# Allegro board PHYSIOTHERAPY_V31_sli.brd
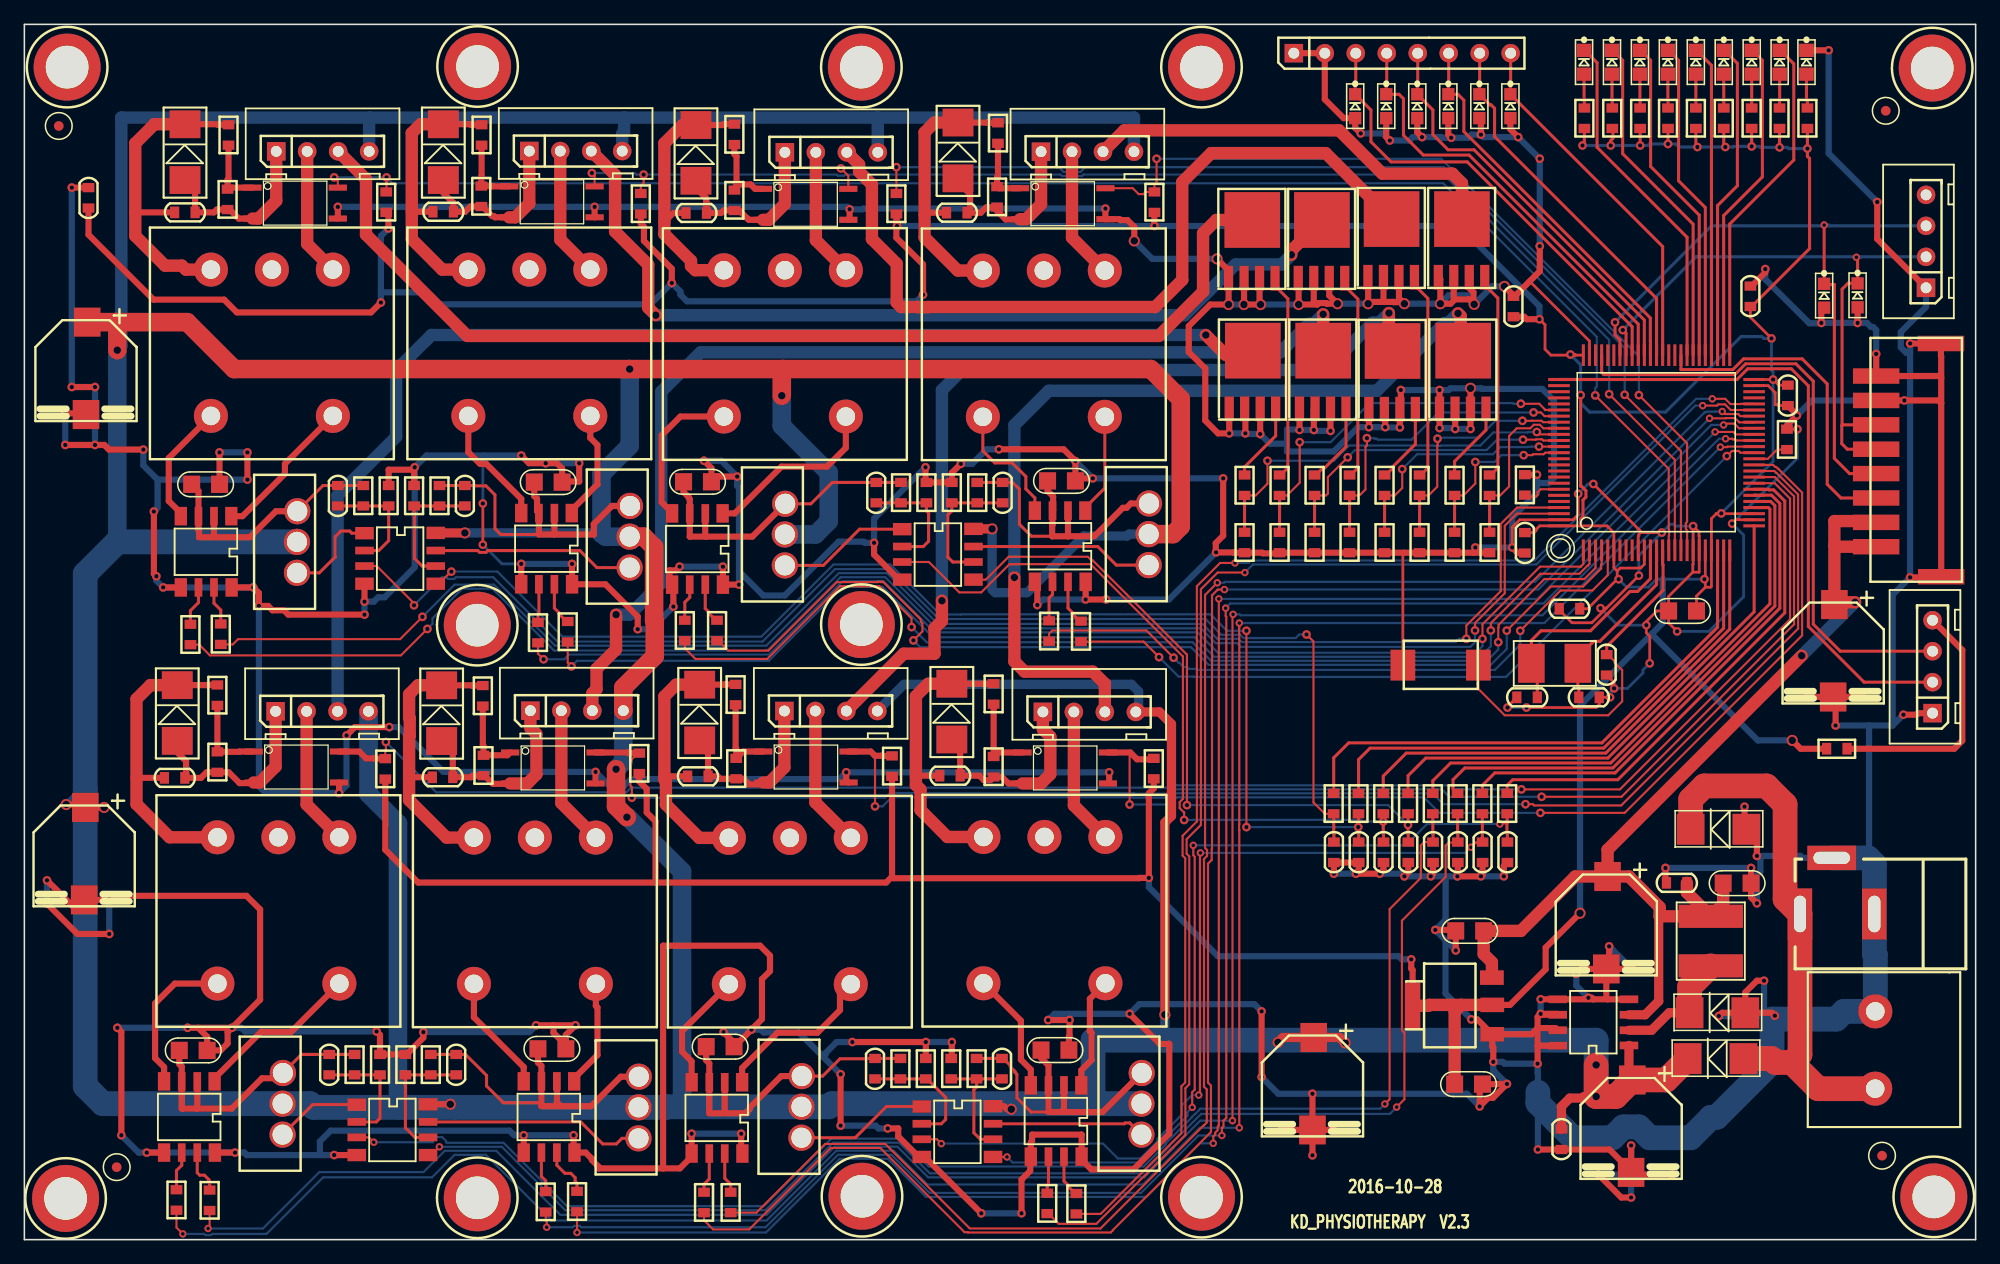
[diagram p0: board, top side]
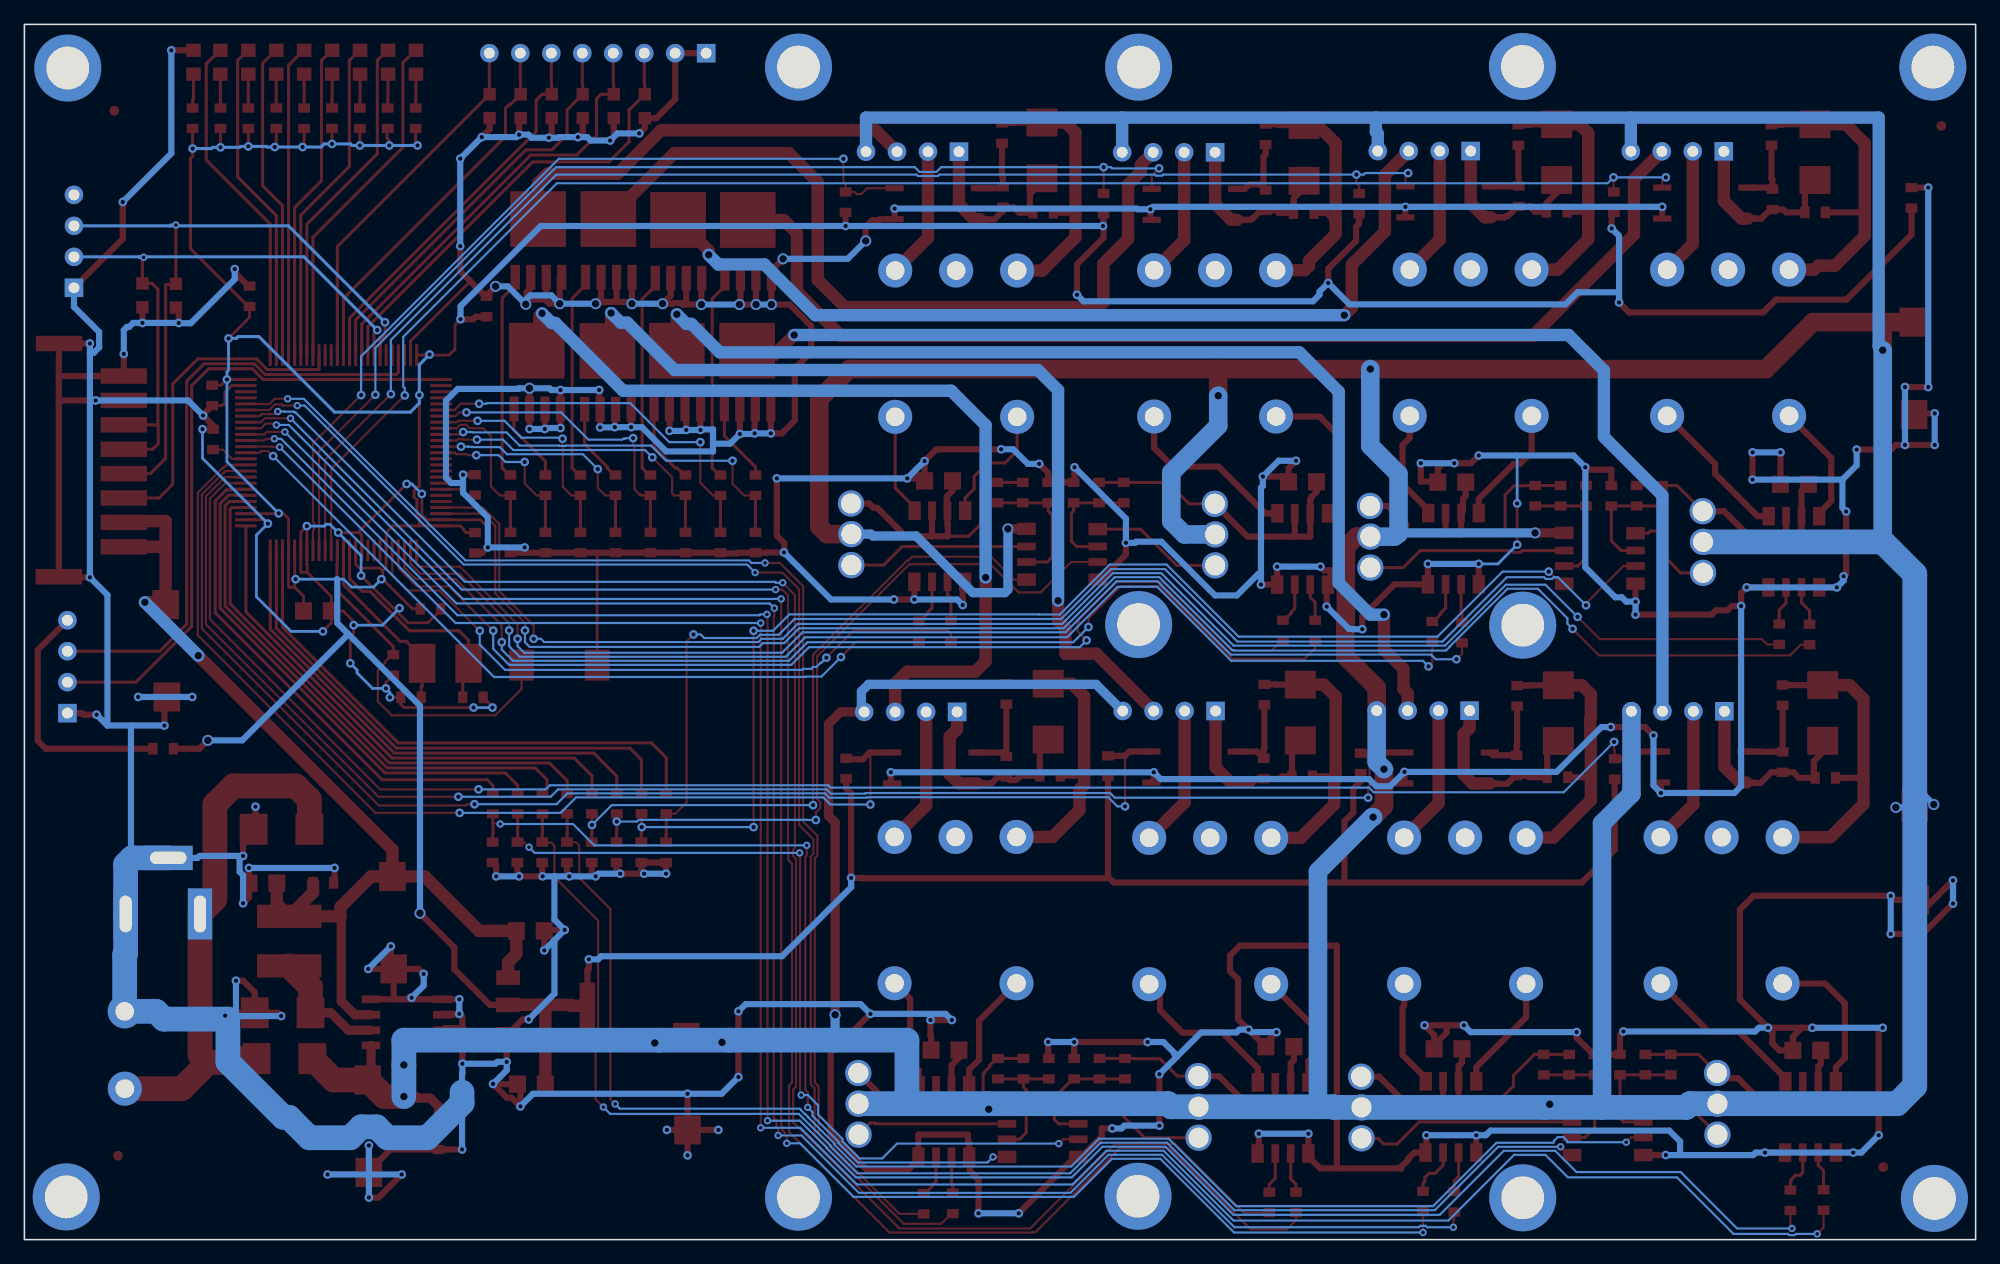
[diagram p1: board, bottom side, seen from below]

Outline 159.99 x 99.67 mm; copper layers: TOP, BOTTOM. Coordinates in mm from the lower left corner of the outline.
Outline path: 0,99.67 0,0 159.99,0 159.99,99.67 0,99.67

## Placement (name value [footprint] x y rotation side)
C1  220uf/35V  [CAP_SMD_8X10D5]  136.8 11.27 270 top
C2  0.1uF  [C0603]  126.03 8.23 90 top
C3  220uf/35V  [CAP_SMD_8X10D5]  134.77 27.96 270 top
C4  0.1uF  [C0603]  135.48 29.26 0 top
C5  10uF  [C0805]  140.44 29.24 180 top
C6  10uF  [C0805]  118.51 25.32 0 top
C7  10uF  [C0805]  118.42 12.75 180 top
C8  0.1uF  [C0603]  5.26 85.45 270 top
C9  15pF  [C0603]  123.22 44.48 0 top
C10  15pF  [C0603]  128.3 44.48 180 top
C11  0.1uF  [C0603]  129.74 47.14 90 top
C64  220uf/35V  [CAP_SMD_8X10D5]  153.37 50.27 270 top
C65  220uf/35V  [CAP_SMD_8X10D5]  10.1 73.43 270 top
C66  220uf/35V  [CAP_SMD_8X10D5]  110.67 14.76 270 top
C67  220uf/35V  [CAP_SMD_8X10D5]  9.95 33.63 270 top
C106  0.1uF  [C0603]  123.04 57.15 270 top
C107  0.1uF  [C0603]  122.1 76.53 90 top
C108  0.1uF  [C0603]  141.53 77.37 90 top
C109  0.1uF  [C0603]  144.6 69.24 270 top
C110  0.1uF  [C0603]  126.7 51.74 180 top
C121  15pF  [C0603]  25.7 61.01 270 top
C122  27nF  [C0603]  107.38 31.77 90 top
C123  15pF  [C0603]  36.12 61.01 270 top
C124  15pF  [C0603]  69.85 61.26 270 top
C125  15pF  [C0603]  80.21 61.26 270 top
C126  15pF  [C0603]  24.99 14.35 270 top
C127  15pF  [C0603]  35.41 14.35 270 top
C128  15pF  [C0603]  69.75 14.02 270 top
C129  15pF  [C0603]  80.16 14.02 270 top
C130  27nF  [C0603]  109.41 31.77 90 top
C131  27nF  [C0603]  111.44 31.77 90 top
C132  27nF  [C0603]  113.47 31.77 90 top
C133  27nF  [C0603]  115.51 31.77 90 top
C134  27nF  [C0603]  117.54 31.77 90 top
C135  27nF  [C0603]  119.57 31.77 90 top
C136  27nF  [C0603]  121.6 31.77 90 top
C137  10uF  [C0805]  135.97 51.56 0 top
C142  10uF  [C0805]  14.86 61.95 180 top
C143  10uF  [C0805]  42.95 62.13 180 top
C144  10uF  [C0805]  55.19 62.15 180 top
C145  10uF  [C0805]  85.04 62.23 180 top
C146  10uF  [C0805]  13.84 15.52 180 top
C147  10uF  [C0805]  43.26 15.65 180 top
C148  10uF  [C0805]  57.05 15.82 180 top
C149  10uF  [C0805]  84.51 15.54 180 top
C150  0.1uF  [C0603]  13.16 84.25 0 top
C151  0.1uF  [C0603]  34.34 84.3 0 top
C152  0.1uF  [C0603]  55.09 84.2 0 top
C153  0.1uF  [C0603]  76.45 84.23 0 top
C154  0.1uF  [C0603]  75.9 38.05 0 top
C155  0.1uF  [C0603]  55.22 38 0 top
C156  0.1uF  [C0603]  34.29 37.92 0 top
C157  0.1uF  [C0603]  12.32 37.87 0 top
D1  SS34  [SMA]  138.67 14.85 0 top
D2  SS34  [SMA]  138.82 18.61 0 top
D3  ESD5Z3V3  [SOD-523]  121.85 92.96 270 top
D5  LED  [LED0603]  146.13 96.58 270 top
D6  ESD5Z3V3  [SOD-523]  119.3 92.96 270 top
D7  LED  [LED0603]  127.89 96.58 270 top
D9  LED  [LED0603]  130.18 96.58 270 top
D10  ESD5Z3V3  [SOD-523]  116.76 92.96 270 top
D12  LED  [LED0603]  132.47 96.58 270 top
D13  LED  [LED0603]  134.76 96.58 270 top
D14  ESD5Z3V3  [SOD-523]  114.21 92.96 270 top
D16  LED  [LED0603]  137.05 96.58 270 top
D17  ESD5Z3V3  [SOD-523]  111.67 92.96 270 top
D19  LED  [LED0603]  139.34 96.58 270 top
D20  ESD5Z3V3  [SOD-523]  109.12 92.96 270 top
D21  LED  [LED0603]  141.64 96.58 270 top
D23  LED  [LED0603]  143.93 96.58 270 top
D25  SMBJ12A  [SMA]  138.91 33.66 0 top
D32  M7  [DO-214AC]  13.17 89.19 270 top
D33  M7  [DO-214AC]  12.53 43.19 270 top
D34  M7  [DO-214AC]  34.21 43.18 270 top
D35  M7  [DO-214AC]  34.35 89.19 270 top
D36  M7  [DO-214AC]  55.07 89.13 270 top
D37  M7  [DO-214AC]  55.37 43.23 270 top
D38  M7  [DO-214AC]  76.05 43.31 270 top
D39  M7  [DO-214AC]  76.56 89.33 270 top
D40  ESD5Z3V3  [SOD-523]  147.57 77.42 270 top
D41  ESD5Z3V3  [SOD-523]  150.32 77.44 270 top
H1  NC/mechanical _pad  [HOLE_3D5_6D0_MM]  3.38 3.38 0 top
H2  NC/mechanical _pad  [HOLE_3D5_6D0_MM]  3.51 96.16 0 top
H3  NC/mechanical _pad  [HOLE_3D5_6D0_MM]  156.57 3.51 0 top
H4  NC/mechanical _pad  [HOLE_3D5_6D0_MM]  156.44 96.09 0 top
H5  NC/mechanical _pad  [HOLE_3D5_6D0_MM]  68.63 96.16 0 top
H6  NC/mechanical _pad  [HOLE_3D5_6D0_MM]  68.68 3.56 0 top
H7  NC/mechanical _pad  [HOLE_3D5_6D0_MM]  96.52 96.16 0 top
H8  NC/mechanical _pad  [HOLE_3D5_6D0_MM]  37.13 3.43 0 top
H9  NC/mechanical _pad  [HOLE_3D5_6D0_MM]  96.52 3.48 0 top
H10  NC/mechanical _pad  [HOLE_3D5_6D0_MM]  68.63 50.44 0 top
H11  NC/mechanical _pad  [HOLE_3D5_6D0_MM]  37.13 50.39 0 top
H12  NC/mechanical _pad  [HOLE_3D5_6D0_MM]  37.16 96.22 0 top
ISO14  TLP185  [TLP121]  22.2 85.01 0 top
ISO15  TLP185  [TLP121]  43.26 85.12 0 top
ISO16  TLP185  [TLP121]  64.06 84.91 0 top
ISO17  TLP185  [TLP121]  85.14 84.96 0 top
ISO18  TLP185  [TLP121]  22.3 38.76 0 top
ISO19  TLP185  [TLP121]  43.33 38.68 0 top
ISO20  TLP185  [TLP121]  64.08 38.76 0 top
ISO21  TLP185  [TLP121]  85.34 38.68 0 top
JP_1  kf635-2p  [KF635-2P]  152.63 15.3 90 top
JP_2  dc-005  [DC-005]  159.19 26.71 180 top
JP_KEY1  dpz_2d54_8p  [DPZ_2D54_8P]  104.09 97.31 0 top
JP_SWD  -  [XH-4A]  156.46 43.18 90 top
JP_USART  -  [XH-4A]  155.93 78.07 90 top
JS_LCD  dwin_2d0_8p  [DWIN_2D0_8P]  151.86 63.86 270 top
KS_REST  KEY_3x6x2d5_2p_SMD  [KEY_3X6X2D5_2P_SMD]  116.18 46.94 180 top
L1  47UH  [CD54]  138.28 24.49 0 top
M1  NC/mark  [MARK]  7.57 5.94 0 top
M2  NC/mark  [MARK]  152.63 92.58 0 top
M3  NC/mark  [MARK]  152.32 6.88 0 top
M4  NC/mark  [MARK]  2.82 91.34 0 top
Q2  PSMN7R0-30YL  [SOT669]  101.04 79.11 0 top
Q3  PSMN7R0-30YL  [SOT669]  101.09 68.39 0 top
Q4  PSMN7R0-30YL  [SOT669]  106.76 79.11 0 top
Q5  PSMN7R0-30YL  [SOT669]  106.86 68.39 0 top
Q6  PSMN7R0-30YL  [SOT669]  112.47 79.18 0 top
Q7  PSMN7R0-30YL  [SOT669]  112.55 68.36 0 top
Q8  PSMN7R0-30YL  [SOT669]  118.24 79.18 0 top
Q9  PSMN7R0-30YL  [SOT669]  118.34 68.39 0 top
Q11  TIP31C  [TO220]  22.35 57.23 90 top
Q12  TIP31C  [TO220]  49.63 57.66 90 top
Q13  TIP31C  [TO220]  62.36 57.84 90 top
Q14  TIP31C  [TO220]  92.19 57.86 90 top
Q15  TIP31C  [TO220]  21.17 11.15 90 top
Q16  TIP31C  [TO220]  50.36 10.85 90 top
Q17  TIP31C  [TO220]  63.72 10.9 90 top
Q18  TIP31C  [TO220]  91.59 11.15 90 top
R3  NC/0R  [R0603]  148.62 40.26 180 top
R4  10K  [R0603]  123.04 61.9 270 top
R5  10K  [R0603]  144.53 65.63 270 top
R10  3.3K  [R0603]  100.05 61.87 270 top
R11  3.3K  [R0603]  102.92 61.87 270 top
R12  100K  [R0603]  100.05 57.18 90 top
R13  100K  [R0603]  102.92 57.18 90 top
R14  3.3K  [R0603]  108.66 61.87 270 top
R15  3.3K  [R0603]  105.79 61.87 270 top
R16  100K  [R0603]  108.66 57.18 90 top
R17  100K  [R0603]  105.79 57.18 90 top
R18  3.3K  [R0603]  114.4 61.87 270 top
R19  3.3K  [R0603]  111.53 61.87 270 top
R20  100K  [R0603]  114.4 57.18 90 top
R21  100K  [R0603]  111.53 57.18 90 top
R22  3.3K  [R0603]  120.14 61.87 270 top
R23  3.3K  [R0603]  117.27 61.87 270 top
R24  100K  [R0603]  120.14 57.18 90 top
R25  100K  [R0603]  117.27 57.18 90 top
R26  3.3K  [R0603]  146.2 91.97 90 top
R27  3.3K  [R0603]  127.91 91.97 90 top
R28  3.3K  [R0603]  130.2 91.97 90 top
R29  3.3K  [R0603]  132.49 91.97 90 top
R30  3.3K  [R0603]  134.77 91.97 90 top
R31  3.3K  [R0603]  137.06 91.97 90 top
R32  3.3K  [R0603]  139.34 91.97 90 top
R33  3.3K  [R0603]  141.63 91.97 90 top
R34  3.3K  [R0603]  143.92 91.97 90 top
R36  10K  [R0603]  16.66 85.32 90 top
R37  51R  [R0603]  16.74 90.6 90 top
R38  10K  [R0603]  29.67 85.09 270 top
R39  10K  [R0603]  37.47 85.57 90 top
R40  51R  [R0603]  37.49 90.6 90 top
R41  10K  [R0603]  50.55 84.96 270 top
R42  10K  [R0603]  58.22 85.24 90 top
R43  51R  [R0603]  58.22 90.65 90 top
R44  10K  [R0603]  71.5 84.96 270 top
R45  10K  [R0603]  79.76 85.52 90 top
R46  51R  [R0603]  79.83 90.75 90 top
R47  10K  [R0603]  92.66 85.09 270 top
R48  10K  [R0603]  15.82 39.17 90 top
R49  51R  [R0603]  15.82 44.65 90 top
R50  10K  [R0603]  29.59 38.61 270 top
R51  10K  [R0603]  37.64 38.89 90 top
R52  51R  [R0603]  37.59 44.6 90 top
R53  10K  [R0603]  50.42 39.07 270 top
R54  10K  [R0603]  58.37 38.63 90 top
R55  51R  [R0603]  58.32 44.7 90 top
R56  10K  [R0603]  71.15 38.84 270 top
R57  10K  [R0603]  79.48 38.79 90 top
R58  51R  [R0603]  79.48 44.75 90 top
R59  10K  [R0603]  92.61 38.63 270 top
R66  10K  [R0603]  29.87 61.01 270 top
R67  27K  [R0603]  27.79 61.01 270 top
R68  5.1K  [R0603]  107.36 35.76 90 top
R69  10K  [R0603]  31.95 61.01 270 top
R70  27K  [R0603]  34.04 61.01 270 top
R71  10K  [R0603]  73.96 61.26 270 top
R72  27K  [R0603]  71.88 61.26 270 top
R73  10K  [R0603]  76.05 61.26 270 top
R74  27K  [R0603]  78.13 61.26 270 top
R75  10K  [R0603]  29.16 14.35 270 top
R76  27K  [R0603]  27.08 14.35 270 top
R77  10K  [R0603]  31.24 14.35 270 top
R78  27K  [R0603]  33.32 14.35 270 top
R79  10K  [R0603]  73.91 14.02 270 top
R80  27K  [R0603]  71.83 14.02 270 top
R81  10K  [R0603]  76 14.02 270 top
R82  27K  [R0603]  78.08 14.02 270 top
R83  5.1K  [R0603]  109.39 35.76 90 top
R84  5.1K  [R0603]  111.42 35.76 90 top
R85  5.1K  [R0603]  113.46 35.76 90 top
R86  5.1K  [R0603]  115.49 35.76 90 top
R87  5.1K  [R0603]  117.52 35.76 90 top
R88  5.1K  [R0603]  119.55 35.76 90 top
R89  5.1K  [R0603]  121.58 35.76 90 top
R90  10K  [R0603]  13.61 49.63 270 top
R91  10K  [R0603]  16.1 49.66 270 top
R92  10K  [R0603]  42.11 49.78 270 top
R93  10K  [R0603]  44.55 49.86 270 top
R94  10K  [R0603]  54.15 49.96 270 top
R95  10K  [R0603]  56.79 49.96 270 top
R96  10K  [R0603]  84.02 49.91 270 top
R97  10K  [R0603]  86.64 49.89 270 top
R98  10K  [R0603]  12.47 3.25 270 top
R99  10K  [R0603]  15.19 3.23 270 top
R100  10K  [R0603]  42.75 3.1 270 top
R101  10K  [R0603]  45.31 3.12 270 top
R102  10K  [R0603]  55.73 3.05 270 top
R103  10K  [R0603]  57.91 3.05 270 top
R104  10K  [R0603]  83.87 2.97 270 top
R105  10K  [R0603]  86.26 2.95 270 top
SIN_1  -  [XH-4A]  20.65 89.26 0 top
SIN_2  -  [XH-4A]  41.4 89.28 0 top
SIN_3  -  [XH-4A]  62.36 89.18 0 top
SIN_4  -  [XH-4A]  83.36 89.23 0 top
SIN_5  -  [XH-4A]  20.6 43.33 0 top
SIN_6  -  [XH-4A]  41.49 43.38 0 top
SIN_7  -  [XH-4A]  62.32 43.36 0 top
SIN_8  -  [XH-4A]  83.52 43.28 0 top
TX1  -  [E19]  20.29 73.56 90 top
TX2  -  [E19]  41.4 73.56 90 top
TX3  -  [E19]  62.36 73.51 90 top
TX4  -  [E19]  83.59 73.48 90 top
TX5  -  [E19]  20.83 27 90 top
TX6  -  [E19]  41.86 26.97 90 top
TX7  -  [E19]  62.76 26.95 90 top
TX8  -  [E19]  83.64 27.03 90 top
U1  XL1509-5.0  [SOIC8]  128.65 17.81 90 top
U2  LM1117-3.3  [SOT-223]  120.31 19.18 90 top
U12  STM32F103VET6  [LQFP100]  133.83 64.54 90 top
U35  MC33202DR2G  [SOP8]  28.14 57.78 270 top
U36  MC33202DR2G  [SOP8]  72.24 58.12 270 top
U37  MC33202DR2G  [SOP8]  27.51 10.92 270 top
U38  MC33202DR2G  [SOP8]  73.84 10.77 270 top
U42  L9110S  [SOP8]  16.81 59.08 180 top
U43  L9110S  [SOP8]  44.73 59.33 180 top
U44  L9110S  [SOP8]  57.1 59.31 180 top
U45  L9110S  [SOP8]  86.84 59.54 180 top
U46  L9110S  [SOP8]  15.44 12.73 180 top
U47  L9110S  [SOP8]  44.93 12.73 180 top
U48  L9110S  [SOP8]  58.7 12.65 180 top
U49  L9110S  [SOP8]  86.51 12.4 180 top
Y1  8M  [CY5032_2P]  125.48 47.27 180 top

## Library data of the parts
C1-C11 C64-C67 C106-C110 C121-C137 C142-C157 = C
D1-D3 D6 D10 D14 D17 D20 D25 D32-D41 = DIODE
D5 D7 D9 D12 D13 D16 D19 D21 D23 = LED0603
H1-H12 M1-M4 = PAD
ISO14-ISO21 = H11G2_1
JP_1 = header_3d5_6
JP_2 = header_3d5_0
JP_KEY1 = CON8
JP_SWD JP_USART SIN_1-SIN_8 = HEADER 4
JS_LCD = dwin_2d0_8p
KS_REST = SW PUSHBUTTON_0
L1 = INDUCTOR_0
Q2-Q9 = STP55NF06L_1
Q11-Q18 = TIP31C_1
R3-R5 R10-R34 R36-R59 R66-R105 = R
TX1-TX8 = E19
U1 = XL1509
U2 = 1117
U12 = STM32F103VE_1
U35-U38 = OMAP_2
U42-U49 = MC34151
Y1 = CRYSTAL

## Footprints (pads in the part's own frame, mm; a bottom-side part is the same pattern mirrored in y, then rotated)
C0603
  rect 0.762x0.965 smd: 1(-0.838,0) 2(0.838,0)
C0805
  rect 1.397x1.422 smd: 1(-1.143,0) 2(1.143,0)
CAP_SMD_8X10D5
  rect 2.388x2.184 smd: 1(-1.82,-4.95) 2(5.76,-5.05)
CD54
  rect 5.283x1.905 smd: 1(0,2.032) 2(0,-2.032)
CY5032_2P
  rect 2.184x3.2 smd: 1(-1.905,0) 2(1.905,0)
DC-005
  rect 2x4.2 hole 1x3: 1(13.6,0) 2(7.5,0)
  rect 4x2 hole 3x1: 3(11,-4.6)
DO-214AC
  rect 2.286x2.54 smd: 1(2.286,0) 2(-2.286,0)
DPZ_2D54_8P
  rect 1.524x1.524 hole 0.889: 1(0,0)
  round 1.524 hole 0.889: 2(2.54,0) 3(5.08,0) 4(7.62,0) 5(10.16,0) 6(12.7,0) 7(15.24,0) 8(17.78,0)
DWIN_2D0_8P
  rect 1.27x3.81 smd: 1(-6.97,-0.02) 2(-4.97,-0.02) 3(-2.97,-0.02) 4(-0.97,-0.02) 5(1.03,-0.02) 6(3.03,-0.02) 7(5.03,-0.02) 8(7.03,-0.02) 9(9.49,5.31) 10(-9.64,5.29)
E19
  round 2.794 hole 1.524: 1(-6,5) 2(-6,-5) 3(6,5) 4(6,-5) 5(6,0)
HOLE_3D5_6D0_MM
  round 5.5 hole 3.5: 1(0,0)
KEY_3X6X2D5_2P_SMD
  rect 2.032x2.54 smd: 1(-3.048,-0.178) 2(3.15,-0.178)
KF635-2P
  round 2.794 hole 1.524: 1(-2.92,0.87) 2(3.42,0.86)
LED0603
  rect 1.092x1.194 smd: 1(0.991,0) 2(-0.965,0)
LQFP100
  rect 1.778x0.254 smd: 1(-8.001,6.002) 2(-8.001,5.502) 3(-8.001,5.001) 4(-8.001,4.501) 5(-8.001,4) 6(-8.001,3.5) 7(-8.001,3) 8(-8.001,2.502) 9(-8.001,2.002) 10(-8.001,1.501) 11(-8.001,1.001) 12(-8.001,0.5) 13(-8.001,0) 14(-8.001,-0.5) 15(-8.001,-1.001) 16(-8.001,-1.501) 17(-8.001,-2.002) 18(-8.001,-2.502) 19(-8.001,-3) 20(-8.001,-3.5) 21(-8.001,-4) 22(-8.001,-4.501) 23(-8.001,-5.001) 24(-8.001,-5.502) 25(-8.001,-6.002) 51(8.001,-6.002) 52(8.001,-5.502) 53(8.001,-5.001) 54(8.001,-4.501) 55(8.001,-4) 56(8.001,-3.5) 57(8.001,-3) 58(8.001,-2.502) 59(8.001,-2.002) 60(8.001,-1.501) 61(8.001,-1.001) 62(8.001,-0.5) 63(8.001,0) 64(8.001,0.5) 65(8.001,1.001) 66(8.001,1.501) 67(8.001,2.002) 68(8.001,2.502) 69(8.001,3) 70(8.001,3.5) 71(8.001,4) 72(8.001,4.501) 73(8.001,5.001) 74(8.001,5.502) 75(8.001,6.002)
  rect 0.254x1.778 smd: 26(-6.002,-8.001) 27(-5.502,-8.001) 28(-5.001,-8.001) 29(-4.501,-8.001) 30(-4,-8.001) 31(-3.5,-8.001) 32(-3,-8.001) 33(-2.502,-8.001) 34(-2.002,-8.001) 35(-1.501,-8.001) 36(-1.001,-8.001) 37(-0.5,-8.001) 38(0,-8.001) 39(0.5,-8.001) 40(1.001,-8.001) 41(1.501,-8.001) 42(2.002,-8.001) 43(2.502,-8.001) 44(3,-8.001) 45(3.5,-8.001) 46(4,-8.001) 47(4.501,-8.001) 48(5.001,-8.001) 49(5.502,-8.001) 50(6.002,-8.001) 76(6.002,8.001) 77(5.502,8.001) 78(5.001,8.001) 79(4.501,8.001) 80(4,8.001) 81(3.5,8.001) 82(3,8.001) 83(2.502,8.001) 84(2.002,8.001) 85(1.501,8.001) 86(1.001,8.001) 87(0.5,8.001) 88(0,8.001) 89(-0.5,8.001) 90(-1.001,8.001) 91(-1.501,8.001) 92(-2.002,8.001) 93(-2.502,8.001) 94(-3,8.001) 95(-3.5,8.001) 96(-4,8.001) 97(-4.501,8.001) 98(-5.001,8.001) 99(-5.502,8.001) 100(-6.002,8.001)
MARK
  round 0.8 smd: 1(0,0)
R0603
  rect 0.762x0.965 smd: 1(-0.838,0) 2(0.838,0)
SMA
  rect 2.286x2.54 smd: 1(2.286,0) 2(-2.286,0)
SOD-523
  rect 1.016x1.016 smd: 1(0.978,0) 2(-0.978,0)
SOIC8
  rect 0.635x1.524 smd: 1(-1.88,-2.921) 2(-0.635,-2.921) 3(0.635,-2.921) 4(1.905,-2.921) 5(1.905,2.921) 6(0.635,2.921) 7(-0.635,2.921) 8(-1.905,2.921)
SOP8
  rect 1.016x1.524 smd: 1(-0.152,-0.254) 4(3.988,-0.254) 5(3.988,5.588) 8(-0.178,5.588)
  rect 0.635x1.524 smd: 2(1.27,-0.254) 3(2.54,-0.254) 6(2.54,5.588) 7(1.27,5.588)
SOT669
  rect 0.762x2.032 smd: 1(-2.3,-0.254) 2(-1.03,-0.254) 3(0.24,-0.254) 4(1.51,-0.254)
  rect 4.572x4.572 smd: 5(-0.36,4.52)
SOT-223
  rect 1.194x1.956 smd: 1(-2.337,-0.051) 2(0.076,-0.051) 3(2.311,-0.025)
  rect 3.81x1.27 smd: 4(0,6.477)
TLP121
  rect 1.499x0.508 smd: 1(-3.5,1.27) 2(-3.5,-1.27) 3(3.5,-1.27) 4(3.5,1.27)
TO220
  round 2.159 hole 1.651: 1(-2.54,0) 2(0,0) 3(2.515,-0.025)
XH-4A
  rect 1.524x1.524 hole 0.889: 1(0,0)
  round 1.524 hole 0.889: 2(2.54,0) 3(5.08,0) 4(7.62,0)

## Nets
GND: C1.2 C2.1 C3.2 C4.1 C5.1 C6.1 C7.1 C8.1 C9.1 C10.1 C11.1 C64.2 C65.2 C66.2 C67.2 C106.2 C107.2 C108.2 C109.2 C110.2 C122.1 C130.1 C131.1 C132.1 C133.1 C134.1 C135.1 C136.1 C137.1 C142.1 C143.1 C144.1 C145.1 C146.1 C147.1 C148.1 C149.1 D2.1 D3.1 D5.2(CATHODE) D6.1 D10.1 D14.1 D17.1 D20.1 D25.1 D40.1 D41.1 ISO14.3 ISO15.3 ISO16.3 ISO17.3 ISO18.3 ISO19.3 ISO20.3 ISO21.3 JP_1.2 JP_2.2 JP_2.3 JP_KEY1.1 JP_KEY1.2 JP_SWD.1 JP_USART.1 JS_LCD.1(GND1) JS_LCD.2(GND2) JS_LCD.9(PAD1) JS_LCD.10(PAD2) KS_REST.2 Q2.1(S1) Q2.2(S2) Q2.3 Q3.1(S1) Q3.2(S2) Q3.3 Q4.1(S1) Q4.2(S2) Q4.3 Q5.1(S1) Q5.2(S2) Q5.3 Q6.1(S1) Q6.2(S2) Q6.3 Q7.1(S1) Q7.2(S2) Q7.3 Q8.1(S1) Q8.2(S2) Q8.3 Q9.1(S1) Q9.2(S2) Q9.3 R4.1 R5.1 R12.1 R13.1 R16.1 R17.1 R20.1 R21.1 R24.1 R25.1 R66.1 R69.1 R71.1 R73.1 R75.1 R77.1 R79.1 R81.1 U1.4(EN) U1.5(GND1) U1.6(GND2) U1.7(GND3) U1.8(GND4) U2.1 U12.10(VSS_5) U12.19(VSSA) U12.20(VREF-) U12.27(VSS_4) U12.49(VSS_1) U12.74(VSS_2) U12.99(VSS_3) U35.4(V-) U36.4(V-) U37.4(V-) U38.4(V-) U42.5(GND1) U42.8(GND2) U43.5(GND1) U43.8(GND2) U44.5(GND1) U44.8(GND2) U45.5(GND1) U45.8(GND2) U46.5(GND1) U46.8(GND2) U47.5(GND1) U47.8(GND2) U48.5(GND1) U48.8(GND2) U49.5(GND1) U49.8(GND2)
VCC_5V: C3.1 C4.2 C5.2 C6.2 C64.1 JS_LCD.7(+5V_1) JS_LCD.8(+5V_2) L1.1 U1.3(FB) U2.3(IN)
VCC_12V: C1.1 C2.2 C65.1 C66.1 C67.1 D1.2 Q11.2(C) Q12.2(C) Q13.2(C) Q14.2(C) Q15.2(C) Q16.2(C) Q17.2(C) Q18.2(C) SIN_1.4 SIN_2.4 SIN_3.4 SIN_4.4 SIN_5.4 SIN_6.4 SIN_7.4 SIN_8.4 U1.1(VIN) U35.8(V+) U36.8(V+) U37.8(V+) U38.8(V+)
VDD_3V3: C7.2 C8.2 C106.1 C107.1 C108.1 C109.1 C110.1 C137.2 R3.2 R26.1 R27.1 R28.1 R29.1 R30.1 R31.1 R32.1 R33.1 R34.1 R38.2 R41.2 R44.2 R47.2 R50.2 R53.2 R56.2 R59.2 U2.2(OUT) U2.4 U12.6(VBAT) U12.11(VDD_5) U12.21(VREF+) U12.22(VDDA) U12.28(VDD_4) U12.50(VDD_1) U12.75(VDD_2) U12.100(VDD_3)
BOOT0: R4.2 U12.94(BOOT0)
BOOT1: R5.2 U12.37(PB2/BOOT1)
DA_FV_1: R68.2 U12.23(PA0/WKAP/ADC123_IN0/TIM5_CH1/TI)
DA_FV_2: R83.2 U12.24(PA1/USART2_RTS(6)/ADC123_IN1/TI)
DA_FV_3: R84.2 U12.25(PA2/USART2_TX(6)/ADC123_IN2/TIM)
DA_FV_4: R85.2 U12.26(PA3/USART2RX/ADC123_IN3/TIM2/5_)
DA_FV_5: R86.2 U12.29(PA4/SPI1_NSS/USART2_CK/ADC12_IN)
DA_FV_6: R87.2 U12.30(PA5/SPI1_SCK/ADC12_IN5/DAC_OUT2)
DA_FV_7: R88.2 U12.31(PA6/SPI1_MISO/ADC12IN6/TIM3_CH1)
DA_FV_8: R89.2 U12.32(PA7/SPI1_MOSI/ADC12IN7/TIM3_CH2)
DA_SIN_1: C122.2 R68.1 U35.3(+)
DA_SIN_2: C130.2 R83.1 U35.5(+)
DA_SIN_3: C131.2 R84.1 U36.3(+)
DA_SIN_4: C132.2 R85.1 U36.5(+)
DA_SIN_5: C133.2 R86.1 U37.3(+)
DA_SIN_6: C134.2 R87.1 U37.5(+)
DA_SIN_7: C135.2 R88.1 U38.3(+)
DA_SIN_8: C136.2 R89.1 U38.5(+)
KEY_X_1: D3.2 JP_KEY1.8 U12.62(PD15/FSMC_D1/(R)TIM4_CH4)
KEY_X_2: D6.2 JP_KEY1.7 U12.63(PC6/I2S2_MCK/TIM8_CH1/SDIO_D6/()
KEY_X_3: D10.2 JP_KEY1.6 U12.64(PC7/I2S3_MCK/TIM8_CH2/SDIO_D7/()
KEY_X_4: D14.2 JP_KEY1.5 U12.65(PC8/TIM8_CH3/SDIO_D0/(R)TIM3_CH)
KEY_X_5: D17.2 JP_KEY1.4 U12.66(PC9/TIM8_CH4/SDIO_D1/(R)TIM3_CH)
KEY_X_6: D20.2 JP_KEY1.3 U12.67(PA8/USART1_CK//TIM1_CH1/MCO)
LCD_BUSY: JS_LCD.6(BUSY) U12.59(PD12/FSMC_A17/(R)TIM4_CH1/(R)US)
LED1: D7.2(CATHODE) U12.58(PD11/FSMC_A16/(R)USART3_CTS)
LED2: D9.2(CATHODE) U12.57(PD10/FSMC_D15/(R)USART3_CK)
LED3: D12.2(CATHODE) U12.56(PD9/FSMC_D14/(R)USART3_RX)
LED4: D13.2(CATHODE) U12.55(PD8/FSMC_D13/(R)USART3_TX)
LED5: D16.2(CATHODE) U12.54(PB15/SPI2_MOSI/I2S2_SD/TIM1_CH3)
LED6: D19.2(CATHODE) U12.53(PB14/SPI2_MISO/TIM1_CH2N/USART3)
LED7: D21.2(CATHODE) U12.52(PB13/SPI2_SCK/I2S2_CK/USART3_CT)
LED8: D23.2(CATHODE) U12.51(PB12/SPI2_NSS/I2S2_WS/I2C2_SMBA)
MOS_IN_A_1: R90.2 U12.98(PE1/FSMC_NBL1)
MOS_IN_A_2: R92.2 U12.1(PE2/TRACECK/FSMC_A23)
MOS_IN_A_3: R94.2 U12.3(PE4/TRACED1/FSMC_A20)
MOS_IN_A_4: R96.2 U12.5(PE6/TRACED3/FSMC_A22)
MOS_IN_A_5: R98.2 U12.39(PE8/FSMC_D5/(R)TIM1_CH1N)
MOS_IN_A_6: R100.2 U12.41(PE10/FSMC_D7/(R)TIM1_CH2N)
MOS_IN_A_7: R102.2 U12.43(PE12/FSMC_D9/(R)TIM1_CH3N)
MOS_IN_A_8: R104.2 U12.45(PE14/FSMC_D11/(R)TIM1_CH4)
MOS_IN_B_1: R91.2 U12.97(PE0/TIM4_ETR/FSMC_NBL0)
MOS_IN_B_2: R93.2 U12.2(PE3/TRACED0/FSMC_A19)
MOS_IN_B_3: R95.2 U12.4(PE5/TRACED2/FSMC_A21)
MOS_IN_B_4: R97.2 U12.38(PE7/FSMC_D4/(R)TIM1_ETR)
MOS_IN_B_5: R99.2 U12.40(PE9/FSMC_D6/(R)TIM1_CH1)
MOS_IN_B_6: R101.2 U12.42(PE11/FSMC_D8/(R)TIM1_CH2)
MOS_IN_B_7: R103.2 U12.44(PE13/FSMC_D10/(R)TIM1_CH3)
MOS_IN_B_8: R105.2 U12.46(PE15/FSMC_D12/(R)TIM1_BKIN)
OSC_IN: C9.2 U12.12(OSC_IN) Y1.2
OSC_OUT: C10.2 U12.13(OSC_OUT) Y1.1
OUT_N_1: TX1.2 U42.1(OUT_A)
OUT_N_2: TX2.1 U43.4(OUT_B)
OUT_N_3: TX3.2 U44.1(OUT_A)
OUT_N_4: TX4.1 U45.4(OUT_B)
OUT_N_5: TX5.2 U46.1(OUT_A)
OUT_N_6: TX6.1 U47.4(OUT_B)
OUT_N_7: TX7.2 U48.1(OUT_A)
OUT_N_8: TX8.1 U49.4(OUT_B)
OUT_P_1: TX1.1 U42.4(OUT_B)
OUT_P_2: TX2.2 U43.1(OUT_A)
OUT_P_3: TX3.1 U44.4(OUT_B)
OUT_P_4: TX4.2 U45.1(OUT_A)
OUT_P_5: TX5.1 U46.4(OUT_B)
OUT_P_6: TX6.2 U47.1(OUT_A)
OUT_P_7: TX7.1 U48.4(OUT_B)
OUT_P_8: TX8.2 U49.1(OUT_A)
PRO_ADC_1: ISO14.4 R38.1 U12.15(ADC12_IN10/PC0)
PRO_ADC_2: ISO15.4 R41.1 U12.16(ADC12_IN11/PC1)
PRO_ADC_3: ISO16.4 R44.1 U12.17(ADC12_IN12/PC2)
PRO_ADC_4: ISO17.4 R47.1 U12.18(ADC12_IN13/PC3)
PRO_ADC_5: ISO18.4 R50.1 U12.33(ADC12_IN14/PC4)
PRO_ADC_6: ISO19.4 R53.1 U12.34(ADC12_IN15/PC5)
PRO_ADC_7: ISO20.4 R56.1 U12.35(PB0/ADC12_IN8/TIM3_CH3/TIM8_CH2)
PRO_ADC_8: ISO21.4 R59.1 U12.36(PB1/ADC12_IN9/TIM3_CH4/TIM8_CH3)
SIN_POWER_1: C121.1 C142.2 Q11.3(E) R67.1 U42.2(VCC1) U42.3(VCC2)
SIN_POWER_2: C123.1 C143.2 Q12.3(E) R70.1 U43.2(VCC1) U43.3(VCC2)
SIN_POWER_3: C124.1 C144.2 Q13.3(E) R72.1 U44.2(VCC1) U44.3(VCC2)
SIN_POWER_4: C125.1 C145.2 Q14.3(E) R74.1 U45.2(VCC1) U45.3(VCC2)
SIN_POWER_5: C126.1 C146.2 Q15.3(E) R76.1 U46.2(VCC1) U46.3(VCC2)
SIN_POWER_6: C127.1 C147.2 Q16.3(E) R78.1 U47.2(VCC1) U47.3(VCC2)
SIN_POWER_7: C128.1 C148.2 Q17.3(E) R80.1 U48.2(VCC1) U48.3(VCC2)
SIN_POWER_8: C129.1 C149.2 Q18.3(E) R82.1 U49.2(VCC1) U49.3(VCC2)
STM32_REST: C11.2 KS_REST.1 U12.14(NRST)
SWCLK: JP_SWD.2 U12.76((R)PA14/JTCK/SWCLK)
SWDIO: JP_SWD.3 U12.72((R)PA13/JTMS/SWDIO)
T_OUT_N_1: SIN_1.2 TX1.4
T_OUT_N_2: SIN_2.2 TX2.4
T_OUT_N_3: SIN_3.2 TX3.4
T_OUT_N_4: SIN_4.2 TX4.4
T_OUT_N_5: SIN_5.2 TX5.4
T_OUT_N_6: SIN_6.2 TX6.4
T_OUT_N_7: SIN_7.2 TX7.4
T_OUT_N_8: SIN_8.2 TX8.4
T_OUT_P_1: C150.1 D32.2 R37.2 TX1.3
T_OUT_P_2: C151.1 D35.2 R40.2 TX2.3
T_OUT_P_3: C152.1 D36.2 R43.2 TX3.3
T_OUT_P_4: C153.1 D39.2 R46.2 TX4.3
T_OUT_P_5: C157.1 D33.2 R49.2 TX5.3
T_OUT_P_6: C156.1 D34.2 R52.2 TX6.3
T_OUT_P_7: C155.1 D37.2 R55.2 TX7.3
T_OUT_P_8: C154.1 D38.2 R58.2 TX8.3
T_OUT_P_PRO_1: C150.2 D32.1 ISO14.2 R36.1 SIN_1.1
T_OUT_P_PRO_2: C151.2 D35.1 ISO15.2 R39.1 SIN_2.1
T_OUT_P_PRO_3: C152.2 D36.1 ISO16.2 R42.1 SIN_3.1
T_OUT_P_PRO_4: C153.2 D39.1 ISO17.2 R45.1 SIN_4.1
T_OUT_P_PRO_5: C157.2 D33.1 ISO18.2 R48.1 SIN_5.1
T_OUT_P_PRO_6: C156.2 D34.1 ISO19.2 R51.1 SIN_6.1
T_OUT_P_PRO_7: C155.2 D37.1 ISO20.2 R54.1 SIN_7.1
T_OUT_P_PRO_8: C154.2 D38.1 ISO21.2 R57.1 SIN_8.1
USART1_RX_PA10: D40.2 JP_USART.3 JS_LCD.5(DOUT) U12.69(PA10/USART_RX/TIM1_CH3)
USART1_TX_PA9: D41.2 JP_USART.2 JS_LCD.3(DIN1) JS_LCD.4(DIN2) U12.68(PA9/USART_TX/TIM1_CH2)
WARM_EN1: R11.2 R13.2 U12.81(PD0/FSMC_D2/(R)CAN_RX)
WARM_EN2: R14.2 R16.2 U12.82(PD1/FSMC_D3/(R)CAN_TX)
WARM_EN3: R18.2 R20.2 U12.83(PD2/TIM3_ETR)
WARM_EN4: R22.2 R24.2 U12.84(PD3/FSMC_CLK/(R)USART2_CTS)
WARM_EN5: R10.2 R12.2 U12.85(PD4/FSMC_NOE/(R)USART2_RTS)
WARM_EN6: R15.2 R17.2 U12.86(PD5/FSMC_NWE/(R)USART2_TX)
WARM_EN7: R19.2 R21.2 U12.87(PD6/FSMC_NWAIT/(R)USART2_RX)
WARM_EN8: R23.2 R25.2 U12.88(PD7/FSMC_NE1/FSMC_NCE2/(R)USART)
WARM_OUT1: Q2.5(D) SIN_1.3
WARM_OUT2: Q4.5(D) SIN_2.3
WARM_OUT3: Q6.5(D) SIN_3.3
WARM_OUT4: Q8.5(D) SIN_4.3
WARM_OUT5: Q3.5(D) SIN_5.3
WARM_OUT6: Q5.5(D) SIN_6.3
WARM_OUT7: Q7.5(D) SIN_7.3
WARM_OUT8: Q9.5(D) SIN_8.3
N17163313: D2.2 L1.2 U1.2(OUTPUT)
N17182705: Q2.4(G) R11.1
N17187502: Q4.4(G) R14.1
N17187592: Q6.4(G) R18.1
N17187694: Q8.4(G) R22.1
N17188442: Q3.4(G) R10.1
N17188562: Q5.4(G) R15.1
N17188699: Q7.4(G) R19.1
N17188834: Q9.4(G) R23.1
N17194265: D7.1(ANODE) R27.2
N17194283: D9.1(ANODE) R28.2
N17194287: D5.1(ANODE) R26.2
N17194764: D12.1(ANODE) R29.2
N17194782: D13.1(ANODE) R30.2
N17194869: D16.1(ANODE) R31.2
N17194887: D19.1(ANODE) R32.2
N17194976: D21.1(ANODE) R33.2
N17194994: D23.1(ANODE) R34.2
N17195705: D1.1 D25.2 JP_1.1 JP_2.1
N17205826: ISO14.1 R36.2 R37.1
N17207073: ISO15.1 R39.2 R40.1
N17207292: ISO16.1 R42.2 R43.1
N17207434: ISO17.1 R45.2 R46.1
N17207822: ISO18.1 R48.2 R49.1
N17207970: ISO19.1 R51.2 R52.1
N17208130: ISO20.1 R54.2 R55.1
N17208292: ISO21.1 R57.2 R58.1
N17269789: C121.2 R66.2 R67.2 U35.2(-)
N17269842: C123.2 R69.2 R70.2 U35.6(-)
N17269878: Q12.1(B) U35.7(OUT)
N17270535: Q11.1(B) U35.1(OUT)
N17291105: JP_SWD.4 R3.1
N17299833: C124.2 R71.2 R72.2 U36.2(-)
N17299884: Q13.1(B) U36.1(OUT)
N17299929: C125.2 R73.2 R74.2 U36.6(-)
N17300002: Q14.1(B) U36.7(OUT)
N17300766: C126.2 R75.2 R76.2 U37.2(-)
N17300844: Q15.1(B) U37.1(OUT)
N17300864: C127.2 R77.2 R78.2 U37.6(-)
N17300946: Q16.1(B) U37.7(OUT)
N17301707: C128.2 R79.2 R80.2 U38.2(-)
N17301768: Q17.1(B) U38.1(OUT)
N17301809: C129.2 R81.2 R82.2 U38.6(-)
N17301870: Q18.1(B) U38.7(OUT)
N17385795: R90.1 U42.6(INT_A)
N17385798: R91.1 U42.7(INT_B)
N17385834: R92.1 U43.6(INT_A)
N17385836: R93.1 U43.7(INT_B)
N17385880: R94.1 U44.6(INT_A)
N17385882: R95.1 U44.7(INT_B)
N17385926: R96.1 U45.6(INT_A)
N17385928: R97.1 U45.7(INT_B)
N17385972: R98.1 U46.6(INT_A)
N17385974: R99.1 U46.7(INT_B)
N17386018: R100.1 U47.6(INT_A)
N17386020: R101.1 U47.7(INT_B)
N17386064: R102.1 U48.6(INT_A)
N17386066: R103.1 U48.7(INT_B)
N17386110: R104.1 U49.6(INT_A)
N17386112: R105.1 U49.7(INT_B)

Pads without a net: H1 1; H2 1; H3 1; H4 1; H5 1; H6 1; H7 1; H8 1; H9 1; H10 1; H11 1; H12 1; JP_USART 4; M1 1; M2 1; M3 1; M4 1; TX1 5; TX2 5; TX3 5; TX4 5; TX5 5; TX6 5; TX7 5; TX8 5; U12 7 8 9 47 48 60 61 70 71 73 77 78 79 80 89 90 91 92 93 95 96

## Via types
v1: diameter 0.711, hole 0.356, TOP to BOTTOM, 265 vias
v2: diameter 0.914, hole 0.61, TOP to BOTTOM, 42 vias
v3: diameter 0.61, hole 0.305, TOP to BOTTOM, 38 vias

## Routing (per net, layer and track width the routed paths; a pad name or vN(x,y) marks a point on that pad's centre or on a via; arc(x,y) is an arc through that point)
GND: length 1513.8
  TOP w0.229: C137.1 133.86,51.56 132.99,50.7 v1(132.99,50.39) 132.99,49.77 133.27,49.49 v1(133.27,47.27) ; C137.1 134.82,52.76 136.8,54.74 ; C137.1 134.82,50.58 v1(135.52,49.89) ; 129.72,51.79 v1(132.38,54.46) ; 129.72,51.79 128.52,50.6 126.9,50.6 125.86,51.64 C110.2 ; 129.72,51.79 v1(129.24,51.79) ; 132.51,57.99 132.51,58.12 v1(128.65,61.98) ; 132.51,57.99 132.38,57.86 132.38,57.75 132.33,57.7 U12.10 ; 132.51,57.99 v1(134.26,57.99) ; 113.11,56.34 113.03,56.26 KS_REST.2 ; R5.1 v1(145.39,66.47) ; 136.8,54.74 137.3,54.74 137.33,54.77 U12.20 137.33,57.7 137.31,57.72 137.31,58.04 v1(136.83,58.52) U12.19 136.83,55.38 136.8,55.36 136.8,54.74 ; v1(140.03,58.72) 140.36,59.05 140.66,59.05 140.68,59.04 U12.27 ; v1(130.35,45.21) 130.35,45.69 C11.1 ; v1(37.59,57) v1(37.59,60.38) ; v1(122,56.77) 122,58.42 122.62,59.04 U12.99 126.99,59.04 127.41,59.46 v1(127.41,61.16) ; v1(123.16,43.64) 128.88,43.64 129.13,43.89 C10.1 v1(130.02,44.48) ; 123.44,78.61 123.44,78.59 128.33,73.7 U12.74 ; U12.49 142.99,70.04 143.56,69.47 143.56,68.48 143.56,68.48 143.78,68.48 143.85,68.4 C109.2 ; v1(121.62,43.64) 121.62,43.71 C9.1
  TOP w0.508: R5.1 144.53,66.78 v1(145.34,67.59) 145.34,67.67 C109.2 ; C66.2 v1(105.62,6.91) ; C66.2 v1(107.31,9) ; C66.2 v1(105.62,11.96) ; C66.2 v1(103.09,9) ; Q2.2 100.01,76.7 v2(100,76.69) v2(101.36,76.69) 101.28,76.77 Q2.3 ; U48.8 58.78,7.16 v1(58.78,8.69) ; v1(26.42,41.35) 27.1,42.04 v1(29.92,42.04) ; ISO14.3 v1(25.7,84.7) ; v1(124.33,19.71) U1.5 128.65,19.71 ; R79.1 v1(73.91,16.21) v1(67.89,16.21) ; v1(151.84,72.64) JS_LCD.1 157.03,70.83 157.17,70.69 ; U2.1 123.58,16.84 124.08,17.34 ; U2.1 120.36,15.84 120.45,15.75 v1(120.45,14.58) ; U2.1 119.14,18.06 v1(118.64,18.06) ; v1(32.72,17.02) 32.72,16.56 31.34,15.19 R77.1 R75.1 29.16,16.79 v1(28.88,17.07) ; 113.03,76.89 v2(113.16,76.76) ; 113.03,76.89 112.71,77.21 Q6.3 ; 113.03,76.89 112.29,76.89 112.27,76.91 111.53,76.91 ; v1(58.45,62.59) 56.77,62.59 C144.1 56.34,63.27 v1(55.73,63.88) ; Q8.3 118.48,78.04 118.82,77.7 118.82,76.77 ; U45.8 v1(87.02,52.5) v1(88.7,52.5) ; Q8.1 116.1,78.76 v2(116.1,76.76) 116.94,76.76 117.3,77.12 ; Q6.2 111.44,77 111.53,76.91 ; v1(116.99,90.37) 116.76,90.61 D10.1 ; ISO16.3 67.67,83.75 v1(67.67,84.51) ; v1(17.02,17.37) 14.25,17.37 ; v1(17.02,17.37) 16.66,17.02 16.66,16.09 16.09,15.52 C146.1 14.99,16.64 14.25,17.37 ; v1(17.02,17.37) 19.33,19.68 19.33,27.08 18.21,28.19 v1(6.96,28.19) 6.63,27.87 C67.2 4.75,27.72 4.75,27.26 4.74,27.25 4.06,27.25 v1(1.85,29.46) ; 14.25,17.37 v1(13.39,17.37) ; C106.2 122.45,56.31 v1(122,56.77) ; v1(7.95,8.56) 7.95,17.04 v1(7.62,17.37) ; C147.1 44.4,15.95 ; 44.4,15.95 43.38,16.97 43.38,17.55 43.36,17.58 ; 44.4,15.95 44.4,16.79 v1(45.19,17.58) 43.36,17.58 ; C149.1 85.65,16.66 85.7,16.71 v1(85.7,18.01) v1(83.95,18.01) ; 118.82,76.77 118.47,77.12 117.3,77.12 ; 118.82,76.77 v2(118.88,76.71) ; v1(53.72,55.19) 53.42,54.89 52.91,54.89 52.9,54.88 52.9,53.93 U44.5 53.21,53.62 v1(53.21,51.92) ; 106,76.69 v2(104.49,76.69) 104.49,78.82 Q4.1 ; 106,76.69 105.73,76.97 Q4.2 ; 106,76.69 106.12,76.81 106.75,76.81 106.8,76.76 v2(107.67,76.76) 107,77.43 Q4.3 ; Q3.2 100.12,68.08 v1(100.12,66.13) ; C134.1 117.54,29.83 v1(117.5,29.79) v1(119.43,29.79) 119.57,29.93 C135.1 ; 58.19,16.15 v1(57.33,17.02) ; 58.19,16.15 C148.1 ; 58.19,16.15 58.55,16.15 v1(59.61,17.22) 60.48,18.08 60.48,21.36 61.14,22.02 61.14,23.29 60.33,24.1 52.38,24.1 52.37,24.1 52.37,5.84 ; v1(81.76,2.16) 81.76,4.93 82.47,5.64 82.47,6.76 U49.5 82.52,7.98 82.63,8.08 82.63,8.61 82.63,8.61 86.69,8.61 86.69,8.61 U49.8 86.69,6.55 87.49,5.76 90.95,5.76 93.88,8.69 93.88,16.05 93.87,16.05 93.09,16.05 v1(90.63,18.52) ; Q3.3 v1(101.33,66.08) ; C3.2 v1(131.8,22.2) ; C3.2 127.66,22.2 v1(127.25,21.79) ; C3.2 129.95,22.43 v1(129.95,24.05) ; C3.2 129.72,19.81 129.82,19.71 ; v1(105.73,66.41) 105.73,68.04 Q5.2 ; Q5.1 v1(104.56,66.41) ; Q7.1 v1(110.25,66.63) ; U43.5 v1(40.74,55.42) ; 128.65,19.71 129.82,19.71 ; 128.65,19.71 128.52,19.84 v1(128.24,19.84) ; 124.08,15.91 124.08,15.9 U1.8 ; 124.08,15.91 v1(124.08,14.43) ; 124.08,15.91 124.08,17.34 ; v1(112.86,69.68) 112.86,68.19 Q7.3 v1(112.79,66.61) ; ISO21.3 88.95,37.52 v1(88.95,38.33) ; v1(107.38,30.01) C122.1 C130.1 109.41,30.24 v1(109.18,30.01) v1(111.14,30.01) 111.44,30.31 C131.1 ; v1(124.33,18.52) 125.65,18.52 U1.6 124.41,18.44 v1(124.33,18.52) ; v1(124.33,18.52) 124.08,18.26 124.08,17.34 ; v1(151.93,85.1) 151.93,82.07 JP_USART.1 ; 131.75,5.62 129.97,7.39 C2.1 v1(124.1,7.39) ; 131.75,5.62 v1(131.75,7.72) ; 131.75,5.62 C1.2 131.92,5.34 v1(135.14,5.34) ; v1(124.26,81.48) 124.26,79.43 122.2,77.37 C107.2 122.1,77.44 v2(121.36,78.18) ; U35.4 v1(27.89,52.32) ; 43.36,17.58 v1(41.96,17.58) ; JP_KEY1.1 JP_KEY1.2 106.63,93.52 108.17,91.98 D20.1 109.12,91.18 v1(109.58,90.73) ; v1(118.58,66.49) Q9.3 v2(118.58,69.82) ; v1(138.94,18.34) 139.2,18.61 D2.1 ; v1(73.89,63.35) 73.89,62.18 R71.1 R73.1 76.05,62.89 v1(76.78,63.63) ; 29.87,61.85 29.87,63.14 29.88,63.14 31.8,63.14 31.95,63.3 ; v1(69.67,57.15) 69.67,56.18 71.73,54.13 U36.4 ; 52.37,5.84 53.75,5.84 54.71,6.81 U48.5 v1(54.71,8.69) ; 52.37,5.84 47.1,5.84 47.09,5.85 47.09,5.97 46.53,6.53 46.53,6.63 46.02,7.14 U47.8 45.03,7.21 v1(45.03,8.56) ; v1(50.29,50.06) 50.29,51.1 47.65,53.75 U43.8 v1(44.91,55.42) ; v1(142.06,31.47) 142.06,32.79 D25.1 141.05,33.81 v1(141.05,35.51) ; v1(83.06,52.04) 83.06,53.75 U45.5 ; C142.1 v1(16,64.57) ; ISO18.3 v1(25.8,36.63) ; v1(46.76,84.7) ISO15.3 ; R4.1 v1(124.03,62.74) ; 31.95,63.3 31.95,61.85 ; 31.95,63.3 v1(32,63.35) ; ISO20.3 67.39,37.69 v1(67.39,38.33) ; D17.1 111.67,90.44 v1(111.96,90.14) ; v1(98.3,62.43) 98.3,57.73 97.69,57.12 97.69,56.39 v1(97.71,56.36) 99.14,56.36 99.16,56.34 R12.1 101.5,56.34 101.55,56.29 102.87,56.29 R13.1 R17.1 R16.1 R21.1 R20.1 R25.1 118.82,56.34 ; C133.1 115.51,29.98 v1(115.32,29.79) ; v1(1.85,27.56) 4.34,25.07 v1(6.96,25.07) ; Q8.2 117.21,77.21 117.3,77.12 ; v1(57.28,55.19) U44.8 v1(58.6,53.72) ; v1(154.62,54.32) 157.12,54.32 JS_LCD.9 157.17,68.61 ; 118.82,56.34 118.97,56.49 v1(118.97,56.77) ; 118.82,56.34 R24.1 ; C136.1 121.31,30.63 v1(121.31,29.79) ; v1(18.29,64.57) v1(18.29,62.33) ; v1(116.04,69.68) Q9.1 v1(116.04,66.56) ; v1(147.35,75.18) 147.35,76.21 D40.1 ; 124.08,17.34 124.08,17.35 125.55,17.35 U1.7 ; D2.1 141.11,20.28 142.06,21.23 v1(142.65,21.23) ; D2.1 143.29,18.61 v1(143.54,18.36) ; Q5.3 v1(107.1,66.33) ; v1(113.16,29.79) 113.47,30.11 C132.1 ; C64.2 v1(146.23,44.51) ; JS_LCD.2 v1(154.15,68.83) 156.95,68.83 157.17,68.61 ; 129.82,19.71 U1.4 ; Q9.2 117.32,68.12 v1(117.32,66.49) ; U42.5 v1(11.38,53.49) ; v1(150.67,44.51) 148.93,44.51 148.51,44.09 v1(148.51,42.16) ; C108.2 141.63,78.21 142.75,79.32 v1(142.75,79.6) ; D5.2 v1(147.95,97.54) ; v1(3.35,67.77) 4.95,67.77 C65.2 ; v1(129.06,5.34) 130.95,3.45 v1(131.75,3.45) ; D14.1 114.21,90.82 v1(114.6,90.42) ; 157.17,70.69 157.17,68.61 ; 157.17,70.69 157.17,72.44 157.15,72.46 JS_LCD.10 v1(154.62,73.5) ; 111.53,76.91 110.34,76.91 v2(110.19,76.76) 110.19,78.91 Q6.1 ; v1(101.45,13.34) v1(101.45,18.72) ; v1(9.75,64.8) 6.93,64.8 6.55,65.18 v1(5.79,65.18) v1(3.35,65.18) ; C4.1 134.57,29.34 v1(134.57,30.48) ; v1(10.82,54.41) 10.62,54.61 v1(10.62,59.72) ; v1(78.46,2.16) 73.84,6.78 U38.4 73.33,6.78 71.65,8.46 71.65,9.11 71.65,9.12 v1(70.79,9.12) ; D3.1 121.85,91.07 v1(122.49,90.42) ; v1(111.58,66.63) 111.58,68.04 Q7.2 ; v1(141.58,30.48) C5.1 141.58,28.06 v1(142.06,27.58) ; D6.1 119.43,91.85 v1(119.43,90.63) ; v2(91.01,81.92) 91.01,83.06 90.45,83.62 89.87,83.62 89.8,83.69 ISO17.3 v1(88.64,84.56) ; v1(45.49,63.68) 45.49,62.18 45.49,62.18 44.15,62.18 C143.1 44.09,63.25 43.66,63.68 v1(42.75,63.68) 41.38,63.68 v1(40.74,64.31) ; C8.1 v1(3.89,86.28) ; v1(87.6,62.43) 86.39,62.43 C145.1 v1(86.18,63.86) 85.22,64.82 v1(79.91,64.82) ; Q3.1 v1(98.79,66.13) 97.88,66.13 96.82,67.18 96.82,71.45 95.48,72.8 95.48,74.93 97.24,76.69 v2(98.74,76.69) Q2.1 98.74,79.49 v2(97.79,80.44) ; v1(17.27,7.14) U46.8 ; R81.1 76.05,14.91 v1(76.05,16.21) ; D41.1 v1(150.32,75.18) ; v1(66.93,9.35) v1(66.93,13.56) ; v1(154.08,43.05) 155.17,43.05 155.3,43.18 JP_SWD.1 ; U42.8 v1(18.77,53.49) 19.23,53.04 v1(19.23,51.97) 19.99,51.97 20.35,51.61 21.29,51.61 21.64,51.26 v1(27.89,51.26) ; U37.4 v1(25.4,6.93) ; ISO19.3 v1(46.83,38.36) ; U47.5 v1(40.94,8.56) ; U46.5 v1(10.03,7.14) ; v1(115.69,25.4) 117.29,25.4 C6.1 v1(117.37,23.72) ; v1(3.89,69.93) v1(5.79,69.93) ; 120.43,11.63 v1(121.56,12.77) 120.8,12.77 120.78,12.75 C7.1 119.33,12.52 v1(119.33,10.92) 120.04,11.63 120.43,11.63
  BOTTOM w0.229: v1(135.52,49.89) 138.13,49.89 140.97,52.73 140.97,57.78 v1(140.03,58.72) 145.39,64.08 v1(145.39,66.47) ; v1(37.59,57) 39.17,55.42 v1(40.74,55.42) ; v1(130.02,44.48) 130.02,44.88 v1(130.35,45.21) 131.44,45.21 132.72,46.48 132.72,46.71 v1(133.27,47.27) ; v1(132.99,50.39) 130.63,50.39 v1(129.24,51.79) ; v1(128.65,61.98) 128.22,61.98 v1(127.41,61.16) ; v1(136.83,58.52) 135.41,58.52 135.25,58.67 134.95,58.67 v1(134.26,57.99) 132.38,56.11 v1(132.38,54.46) ; v1(37.59,60.38) 37.59,64.21 37.69,64.31 ; v1(123.16,43.64) v1(121.62,43.64)
  BOTTOM w0.508: v1(16,64.57) v1(18.29,64.57) ; 58.6,54.61 58.6,61.67 58.45,61.82 v1(58.45,62.59) 57.15,63.88 v1(55.73,63.88) ; 58.6,54.61 v1(58.6,53.72) ; 58.6,54.61 58.8,54.61 60.58,52.83 62.36,52.83 66.76,57.24 68.82,57.24 68.91,57.15 v1(69.67,57.15) 69.67,59.13 v1(73.89,63.35) ; 124.1,12.09 124.1,13.64 124.08,13.67 v1(124.08,14.43) 121.36,14.43 121.21,14.58 v1(120.45,14.58) 120.45,13.89 v1(121.56,12.77) ; v1(142.06,27.58) 142.06,29.88 142.35,30.17 142.35,31.19 v1(142.06,31.47) 145.63,31.47 145.79,31.31 JP_2.3 ; 143.07,18.34 143.33,18.08 143.54,18.29 v1(143.54,18.36) ; 143.07,18.34 142.65,18.77 v1(142.65,21.23) ; 143.07,18.34 v1(138.94,18.34) ; 116.54,29.79 v1(115.32,29.79) v1(113.16,29.79) 112.94,30.01 v1(111.14,30.01) ; 116.54,29.79 116.54,26.25 v1(115.69,25.4) 116.53,24.56 ; 116.54,29.79 v1(117.5,29.79) ; v1(127.25,21.79) 127.25,20.83 v1(128.24,19.84) ; v1(101.45,18.72) 100.86,19.31 91.42,19.31 v1(90.63,18.52) 84.45,18.52 v1(83.95,18.01) ; v1(9.75,64.8) 9.75,63.5 10.92,62.33 ; v1(112.86,69.68) v1(116.04,69.68) 116.8,69.68 116.94,69.82 v2(118.58,69.82) 119.44,69.82 119.49,69.77 124.46,69.77 125.43,68.81 125.43,62.48 124.99,62.05 124.03,62.05 ; v1(28.88,17.07) 18.08,17.07 17.78,17.37 v1(17.02,17.37) ; v1(29.92,42.04) 30.68,42.04 34.36,38.36 v1(46.83,38.36) 48.01,37.19 49.15,37.19 49.73,37.77 66.83,37.77 v1(67.39,38.33) v1(88.95,38.33) ; v1(154.62,73.5) 154.62,72.73 ; 154.62,72.73 154.31,72.73 153.86,73.18 153.86,74.44 155.93,76.5 JP_USART.1 ; 154.62,72.73 v1(154.62,54.32) 153.19,52.88 153.19,42.16 ; v1(83.06,52.04) 83.52,52.5 v1(87.02,52.5) ; 124.03,62.05 124.03,61.26 122,59.23 v1(122,56.77) v1(118.97,56.77) ; 124.03,62.05 v1(124.03,62.74) ; v1(67.89,16.21) 66.6,16.21 65.68,15.29 65.68,15.19 65.49,15 ; v1(141.58,30.48) v1(134.57,30.48) ; 153.19,42.16 151.26,42.16 ; 153.19,42.16 v1(154.08,43.05) ; 103.53,65.28 102.13,65.28 v1(101.33,66.08) 100.17,66.08 v1(100.12,66.13) v1(98.79,66.13) ; 103.53,65.28 103.53,66.44 103.54,66.45 104.52,66.45 v1(104.56,66.41) v1(105.73,66.41) 105.81,66.33 v1(107.1,66.33) ; 103.53,65.28 103.53,64.65 103.54,64.64 107.37,64.64 109.36,66.63 v1(110.25,66.63) v1(111.58,66.63) 111.6,66.61 v1(112.79,66.61) ; v1(45.03,8.56) v1(40.94,8.56) 40.18,8.56 40.08,8.66 40.06,8.66 39.78,8.94 25.12,8.94 24.23,8.05 24.23,6.93 ; v1(78.46,2.16) v1(81.76,2.16) ; v1(53.21,51.92) 51.38,50.09 51.08,50.09 51.05,50.06 v1(50.29,50.06) ; v1(154.15,68.83) 146.58,68.83 v1(145.34,67.59) ; 116.53,24.56 116.53,20.17 v1(118.64,18.06) ; 116.53,24.56 v1(117.37,23.72) ; v1(116.04,66.56) 117.25,66.56 v1(117.32,66.49) v1(118.58,66.49) ; v1(86.18,63.86) v1(87.6,62.43) v1(98.3,62.43) ; v1(3.35,65.18) v1(3.35,67.77) ; 24.23,6.93 18.24,6.93 18.03,7.14 v1(17.27,7.14) v1(10.03,7.14) 9.37,7.14 v1(7.95,8.56) ; 24.23,6.93 v1(25.4,6.93) ; v1(107.38,30.01) v1(109.18,30.01) ; v1(73.91,16.21) v1(76.05,16.21) ; v1(1.85,27.56) v1(1.85,29.46) ; v1(146.23,44.51) v1(150.67,44.51) ; 151.26,42.16 v1(148.51,42.16) ; 151.26,42.16 151.26,31.22 ; v1(40.74,64.31) 32.97,64.31 v1(32,63.35) 32,55.14 29.54,52.68 29.01,52.68 28.65,52.32 v1(27.89,52.32) v1(27.89,51.26) ; v1(119.33,10.92) 118.29,11.96 v1(105.62,11.96) 102.82,11.96 v1(101.45,13.34) ; v1(40.74,55.42) v1(44.91,55.42) ; v2(113.16,76.76) v2(116.1,76.76) 116.79,77.44 118.52,77.44 118.88,77.08 v2(118.88,76.71) 120.35,78.18 v2(121.36,78.18) ; 124.1,11.2 v1(124.1,7.39) ; v1(124.26,81.48) v1(124.26,88.66) v1(122.49,90.42) 119.63,90.42 v1(119.43,90.63) 118.67,90.63 118.41,90.37 v1(116.99,90.37) 116.23,90.37 116.18,90.42 v1(114.6,90.42) 113.84,90.42 113.56,90.14 v1(111.96,90.14) 111.38,90.73 v1(109.58,90.73) ; v1(76.78,63.63) 77.72,63.63 78.92,64.82 v1(79.91,64.82) ; v1(131.8,22.2) v1(129.95,24.05) ; 10.92,62.33 v1(18.29,62.33) ; 10.92,62.33 10.92,60.02 v1(10.62,59.72) ; v1(97.71,56.36) 93.85,52.5 v1(88.7,52.5) ; v1(124.33,19.71) v1(124.33,18.52) ; v1(18.77,53.49) v1(11.38,53.49) 10.82,54.05 v1(10.82,54.41) ; v1(57.28,55.19) v1(53.72,55.19) ; v2(97.79,80.44) 92.48,80.44 v2(91.01,81.92) ; v1(19.23,51.97) 19.23,37.19 19.78,36.63 v1(25.8,36.63) 26.42,37.25 v1(26.42,41.35) ; 65.49,15 63.5,16.99 60.6,16.99 60.38,17.22 v1(59.61,17.22) 59.41,17.02 v1(57.33,17.02) ; 65.49,15 v1(66.93,13.56) ; v2(101.36,76.69) v2(104.49,76.69) ; v1(88.64,84.56) 68.78,84.56 68.72,84.51 v1(67.67,84.51) 67.47,84.7 v1(46.76,84.7) v1(25.7,84.7) ; v1(42.75,63.68) v1(45.49,63.68) ; v1(41.96,17.58) 41.4,17.02 v1(32.72,17.02) ; v1(147.95,97.54) 147.95,89.08 v1(151.93,85.1) ; v1(7.62,17.37) v1(13.39,17.37) ; v1(66.93,9.35) 69.8,9.35 70.03,9.12 v1(70.79,9.12) ; v1(119.43,29.79) v1(121.31,29.79) ; v1(142.75,79.6) 142.75,78.77 146.35,75.16 147.32,75.16 v1(147.35,75.18) v1(150.32,75.18) 151.08,75.18 151.41,74.85 151.59,74.85 151.84,74.6 v1(151.84,72.64) ; v1(3.89,86.28) v1(3.89,69.93) ; v2(98.74,76.69) v2(100,76.69) ; v1(129.06,5.34) v1(135.14,5.34) ; v1(6.96,28.19) v1(6.96,25.07) ; v2(107.67,76.76) v2(110.19,76.76) ; v1(131.75,7.72) v1(131.75,3.45) ; v1(5.79,69.93) v1(5.79,65.18) ; v1(58.78,8.69) v1(54.71,8.69)
  BOTTOM w2.032: 124.1,12.09 124.1,11.2 126.95,8.36 130.22,8.36 131.12,9.25 132.38,9.25 133.27,8.36 136.63,8.36 138.3,10.03 138.76,10.03 143.31,14.58 143.31,18.06 143.33,18.08 148.57,18.08 149.21,18.72 JP_1.2 151.77,23.36 151.69,23.44 JP_2.2 151.69,30.78 151.17,31.31 JP_2.3
VCC_5V: length 89.4
  TOP w0.762: U1.3 132.89,18.44 134.01,19.56 134.01,26.44 134.09,26.52
  TOP w1.016: L1.1 139.3,27.54 C5.2 ; L1.1 134.09,26.52 134.09,27.26 131.57,29.78 C3.1 ; L1.1 136.32,28.47 C4.2 ; JS_LCD.7 151.74,58.93 148.43,58.93 148.42,58.92 148.42,56.95 ; 148.42,56.95 148.54,56.83 JS_LCD.8 ; 148.42,56.95 C64.1 148.6,52.27 v2(150.11,52.27) ; C3.1 129.82,31.97 v2(145.73,47.89) ; C3.1 127.17,29.78 122.71,25.32 C6.2 119.66,23.42 120.33,22.75 U2.3
  BOTTOM w1.016: v2(145.73,47.89) v2(150.11,52.27)
VCC_12V: length 683.1
  TOP w0.508: U38.8 80.31,10.95 80.57,10.69 v2(80.92,10.69) ; v2(3.43,35.69) 4.76,35.69 C67.1 v2(6.54,35.45) ; U37.8 v2(34.92,11.1)
  TOP w0.762: C1.1 131.57,13.37 U1.1 ; v2(108.31,16.13) 107.86,16.58 C66.1 103.19,16.58 v2(102.79,16.18) ; v2(93.52,18.45) 93.52,34.21 94.06,34.75 94.06,42.29 93.07,43.28 SIN_8.4 ; U35.8 v2(36.12,57.96) ; U36.8 v2(79.35,58.29) ; C2.2 126.03,10.92 126.72,11.61 127.76,11.61 127.89,11.73 v2(128.88,11.73)
  TOP w1.524: 7.49,75.25 7.62,75.12 v2(7.62,72.95) ; 7.49,75.25 13.35,75.25 17.2,71.4 v2(49.63,71.4) 62.18,71.4 ; 7.49,75.25 C65.1 ; v2(62.1,69.22) 62.1,71.32 62.18,71.4 ; v2(49.4,34.65) 48.51,35.53 v2(48.51,38.58) ; Q14.2 94.18,57.86 94.82,58.5 94.82,68.94 92.35,71.4 62.18,71.4 ; Q12.2 50.77,57.66 51.64,56.79 51.64,50.77 51.69,50.72 51.69,47.85 49.11,45.28 SIN_6.4
  TOP w2.032: D1.2 134.63,13.09 C1.1 130.49,11.73 v2(128.88,11.73) v2(128.88,14.33)
  BOTTOM w0.508: v2(80.92,10.69) 80.92,11.07 81,11.15 ; v2(6.54,35.45) 5.08,35.45 4.99,35.53 ; v2(34.92,11.1) 35.05,11.1 35.31,10.85 ; 4.99,36.93 4.67,36.93 v2(3.43,35.69)
  BOTTOM w0.762: v2(102.79,16.18) 102.39,16.18 102.21,16.36 ; v2(79.35,58.29) 79.35,53.31 79.6,53.06 82.22,53.06 86.87,57.71 90.42,57.71 90.58,57.86 Q14.2 ; v2(108.31,16.13) 108.2,16.13 107.98,16.36 ; SIN_7.4 72.12,45.54 90.78,45.54 91.36,44.96 91.36,43.51 SIN_8.4 ; v2(93.52,18.45) 93.52,16.41 93.57,16.36 ; v2(36.12,57.96) 47.33,57.96 47.41,57.89
  BOTTOM w1.016: 69.98,92.02 SIN_3.4 ; 69.98,92.02 49.17,92.02 ; 69.98,92.02 90.97,92.02 90.98,92.01 SIN_4.4 ; 49.17,92.02 49.17,90.86 49.02,90.7 SIN_2.4 ; 49.17,92.02 28.27,92.02 ; 28.27,92.02 7.96,92.02 7.95,92.01 7.95,73.28 v2(7.62,72.95) ; 28.27,92.02 SIN_1.4
  BOTTOM w1.524: SIN_6.4 49.11,39.18 v2(48.51,38.58) ; v2(49.4,34.65) 49.48,34.65 53.92,30.2 53.92,10.9 ; 30.66,10.85 30.63,10.87 30.63,34.14 28.22,36.55 SIN_5.4 ; v2(49.63,71.4) 49.63,65.1 47.32,62.79 47.32,57.9 47.34,57.89 47.41,57.89 47.64,57.66 Q12.2 ; Q13.2 64.87,57.84 65.95,58.91 65.95,62.9 62.1,66.75 v2(62.1,69.22) ; 7.62,57.23 v2(7.62,72.95)
  BOTTOM w2.032: Q18.2 87.63,11.15 ; 87.63,11.15 66.22,11.15 65.96,10.9 Q17.2 52.65,10.9 52.6,10.85 Q16.2 23.72,10.85 23.42,11.15 Q15.2 6.43,11.15 4.99,12.59 4.99,54.6 7.62,57.23 Q11.2 ; 87.63,11.15 87.63,16.34 87.65,16.36 128.86,16.36 128.88,16.34 v2(128.88,14.33) v2(128.88,11.73)
VDD_3V3: length 509
  TOP w0.229: 138.74,59.54 U12.28 ; 138.74,59.54 138.76,59.56 v1(139.14,59.56) ; 138.74,59.54 138.33,59.14 U12.22 138.33,53.57 138.26,53.51 137.83,53.51 ; 130.61,54.84 130.61,54.17 ; 130.61,54.84 130.33,55.11 U12.6 130.33,57.98 129.78,58.54 U12.100 124.25,58.54 123.95,58.24 123.95,58.15 123.79,57.99 C106.1 ; 130.61,54.84 130.85,55.08 132.53,55.08 132.83,55.38 U12.11 ; 130.61,54.17 v1(130.72,54.17) ; 130.61,54.17 128.18,51.74 C110.1 ; U12.75 125.17,72.54 124.69,73.03 124.69,75.03 v1(124.23,75.49) ; U12.50 v1(143.39,70.54) 143.85,70.08 C109.1 ; C108.1 141.53,75.64 v1(143.26,73.91) ; 137.83,53.51 137.83,54.41 ; 137.83,53.51 137.11,52.78 C137.2 ; 137.83,54.41 U12.21 ; 137.83,54.41 137.76,54.33 v1(137.76,54.17)
  TOP w0.254: v1(126.77,72.59) 127.13,72.59 127.18,72.54 ; C108.1 141.63,76.53 146.38,81.28 146.38,88.67 146.2,88.85 v1(146.2,89.48) R26.1 ; R31.1 137.06,89.74 v1(137.19,89.61) ; v1(127.61,69.27) 127.61,61.8 127.61,61.8 127.67,61.8 128.04,61.43 128.04,60.9 127.8,60.66 127.8,59.3 127.61,59.11 127.61,58.54 ; v1(130.07,89.74) 130.07,90.14 130.25,90.32 130.25,91.08 R28.1 ; R29.1 v1(132.49,89.74) ; v1(127.76,89.74) 127.91,89.89 R27.1 ; R30.1 v1(134.77,89.87) ; R32.1 139.34,89.74 v1(139.47,89.61) ; R34.1 v1(143.92,89.59) ; R33.1 v1(141.63,89.66)
  TOP w0.508: v1(71.55,83.13) 71.55,84.07 R44.2 71.5,82.17 73.69,79.98 v1(73.69,77.5) ; v1(53.09,78.46) 53.09,79.63 50.8,81.92 50.8,83.08 50.55,83.34 R41.2 ; U2.4 113.83,22.11 113.72,22.23 v1(113.72,22.99) ; R47.2 v1(92.66,83.13) ; v1(124.23,75.49) 123.19,75.49 122.99,75.69 C107.1 ; 51.75,29.29 70.66,29.29 71.15,29.77 ; 51.75,29.29 32.28,29.29 29.59,31.98 R50.2 ; 51.75,29.29 51.75,34.31 51.03,35.03 51.03,36.97 50.42,37.58 R53.2 ; R59.2 92.61,37.01 92.2,36.6 v1(92.2,29.67) 91.44,29.67 91.41,29.64 71.27,29.64 71.15,29.77 ; U2.2 121.82,19.25 124.74,22.17 124.74,23.95 v2(127.56,26.77) ; 71.15,29.77 R56.2 ; R3.2 145.64,40.26 v2(144.96,40.94) ; R38.2 29.84,84.07 v1(29.84,82.93) ; v1(29.24,76.86) 28.42,76.05 17.42,76.05 16.38,77.09 10.59,77.09 5.26,82.42 C8.2
  TOP w1.016: U2.2 117.83,19.25 ; 117.83,19.25 115.2,19.25 115.13,19.18 U2.4 ; 117.83,19.25 117.28,18.7 C7.2
  BOTTOM w0.229: v1(137.76,54.17) 133.82,54.17 133.17,53.52 131.37,53.52 v1(130.72,54.17) ; v1(143.26,73.91) 143.26,71.3 143.39,71.17 v1(143.39,70.54) 143.39,63.81 v1(139.14,59.56)
  BOTTOM w0.254: v1(126.77,72.59) 127.61,71.75 v1(127.61,69.27) 127.61,68.61 128.35,67.87 134.57,67.87 140.77,74.07 142.47,74.07 142.62,73.91 v1(143.26,73.91) ; v1(146.2,89.48) 144.65,89.48 144.55,89.59 v1(143.92,89.59) 142.34,89.59 142.27,89.66 v1(141.63,89.66) 140.16,89.66 140.11,89.61 v1(139.47,89.61) v1(137.19,89.61) 135.66,89.61 135.41,89.87 v1(134.77,89.87) 133.25,89.87 133.12,89.74 v1(132.49,89.74) v1(130.07,89.74) v1(127.76,89.74)
  BOTTOM w0.508: 133.43,49.66 127.56,43.79 v2(127.56,26.77) ; 133.43,49.66 142.14,40.94 v2(144.96,40.94) ; 133.43,49.66 134.34,50.57 134.34,54.14 134.37,54.17 ; v1(29.24,76.86) 29.24,77.7 ; 29.24,77.7 29.24,82.32 v1(29.84,82.93) ; 29.24,77.7 32.64,77.7 33.63,76.71 51.33,76.71 v1(53.09,78.46) 53.8,77.75 53.8,77.5 54.34,76.96 73.15,76.96 v1(73.69,77.5) ; v1(92.2,29.67) 92.2,28.91 97.87,23.24 112.7,23.24 112.95,22.99 v1(113.72,22.99) ; v1(124.23,75.49) 124.23,76.56 117.65,83.13 v1(92.66,83.13) v1(71.55,83.13)
BOOT0: length 3.2
  TOP w0.178: U12.94 124.33,61.54 124.08,61.29 124.08,61.06 123.95,60.93 123.16,60.93 R4.2
BOOT1: length 3
  TOP w0.178: R5.2 143.72,64.8 142.96,64.04 U12.37
DA_FV_1: length 45.1
  TOP w0.254: R68.2 107.36,39.52 108.58,40.74 129.36,40.74 138.83,50.22 U12.23
DA_FV_2: length 43.6
  TOP w0.254: R83.2 109.39,37.26 109.4,37.27 109.4,39.37 110.34,40.31 129.5,40.31 139.33,50.15 U12.24
DA_FV_3: length 41.3
  TOP w0.254: U12.25 139.83,50.07 129.67,39.9 113.31,39.9 111.42,38.02 R84.2
DA_FV_4: length 42.4
  TOP w0.254: U12.26 141.83,51.49 129.84,39.5 114.91,39.5 113.46,38.04 R85.2
DA_FV_5: length 43.8
  TOP w0.254: U12.29 143,60.04 143.13,59.91 143.13,52.15 130.07,39.09 116.94,39.09 115.49,37.64 R86.2
DA_FV_6: length 43.6
  TOP w0.254: U12.30 143.19,60.54 143.54,60.2 143.54,51.97 130.25,38.68 118.11,38.68 117.14,37.72 117.14,36.98 R87.2
DA_FV_7: length 42.1
  TOP w0.254: R88.2 119.55,37.26 120.57,38.28 130.43,38.28 143.94,51.79 143.94,60.38 143.26,61.06 141.85,61.06 U12.31
DA_FV_8: length 41.4
  TOP w0.254: R89.2 121.58,37.26 122.04,37.72 130.66,37.72 144.35,51.41 144.35,60.58 143.43,61.49 143.05,61.49 143,61.54 U12.32
DA_SIN_1: length 105.3
  TOP w0.178: v1(105.13,49.63) 105.7,49.06 105.7,35.86 106.64,34.92 R68.1 ; U35.3 28.89,55.24 32.03,52.11 32.03,52.11 v1(31.95,52.03)
  TOP w0.254: C122.2 107.38,33.26 107.36,33.28 R68.1
  BOTTOM w0.178: v1(105.13,49.63) 104.53,49.63 104.24,49.34 99.96,49.34 99.69,49.61 98.15,49.61 96.85,50.9 74.98,50.9 70.89,54.99 66.47,54.99 60.53,49.05 43.71,49.05 38.43,54.33 35.39,54.33 35.26,54.19 34.73,54.19 34.59,54.33 34.25,54.33 v1(31.95,52.03)
DA_SIN_2: length 101.7
  TOP w0.178: 109.39,34.09 109.37,34.07 v1(109.37,33.83) ; v1(35.01,54.79) 34.98,54.79 33.99,53.8 U35.5 ; v1(100.2,49.94) v1(100.2,33.83)
  TOP w0.254: R83.1 109.39,33.28 109.41,33.26 C130.2
  BOTTOM w0.178: v1(35.01,54.79) 38.79,54.79 44.12,49.45 60.43,49.45 66.34,55.37 70.99,55.37 75.1,51.27 76.82,51.27 76.83,51.28 97.26,51.28 98.6,49.94 v1(100.2,49.94) ; v1(100.2,33.83) v1(109.37,33.83)
DA_SIN_3: length 60.5
  TOP w0.178: v1(95.1,34.42) 95.1,35.04 95.1,35.04 95.08,35.04 94.73,35.39 94.73,35.88 95,36.15 95,47.83 87.43,55.4 80.77,55.4 78.46,53.09 76.66,53.09 74.17,55.58 U36.3
  TOP w0.254: C131.2 111.44,33.26 111.42,33.28 v1(111.42,34.29) R84.1
  BOTTOM w0.178: v1(111.42,34.29) 109.76,34.29 109.62,34.43 95.83,34.43 95.82,34.42 v1(95.1,34.42)
DA_SIN_4: length 55.1
  TOP w0.178: v1(95.33,35.64) 95.33,47.98 87.58,55.73 87.48,55.73 87.2,56.01 80.71,56.01 78.83,54.13 U36.5
  TOP w0.254: R85.1 v1(113.46,34.01) 113.46,33.28 113.47,33.26 C132.2
  BOTTOM w0.178: v1(95.33,35.64) 111.83,35.64 v1(113.46,34.01)
DA_SIN_5: length 118.4
  TOP w0.178: v3(28.65,7.99) 28.26,8.38 U37.3 ; C133.2 114.78,32.6 114.5,32.32 114.5,29.67 111.94,27.11 111.94,11.51 v3(111.56,11.13)
  TOP w0.254: R86.1 115.49,33.28 115.51,33.26 C133.2
  BOTTOM w0.178: v3(111.56,11.13) 111.17,10.74 96.41,10.74 96.32,10.64 96.32,10.62 95.99,10.29 95.96,10.29 95.71,10.03 95.71,10.01 93.57,7.87 93.57,7.79 91.78,5.99 74.15,5.99 71.87,8.28 66.17,8.28 60.63,2.74 44.49,2.74 39.29,7.94 34.62,7.94 34.57,7.99 34.57,8.09 34.26,8.41 33.8,8.41 33.48,8.09 33.48,7.99 v3(28.65,7.99)
DA_SIN_6: length 114.2
  TOP w0.178: v3(34.03,7.61) 34.03,7.61 33.35,6.93 U37.5 ; C134.2 117.5,32.56 116.79,32.56 116.54,32.31 116.54,29.74 112.95,26.16 112.95,17.17 113.16,16.97 113.16,11.51 v3(112.52,10.87)
  TOP w0.254: C134.2 117.54,33.26 117.52,33.28 R87.1
  BOTTOM w0.178: v3(112.52,10.87) 111.96,10.31 96.49,10.31 93.9,7.72 93.9,7.65 91.69,5.44 74.24,5.44 71.73,7.95 66.31,7.95 60.77,2.41 44.35,2.41 39.15,7.61 v3(34.03,7.61)
DA_SIN_7: length 72
  TOP w0.178: v3(96.3,11.85) 96.3,11.92 96.39,12.01 96.39,31.72 v3(96.43,31.72) ; U38.3 74.83,8.23 v3(75.18,7.87) ; v3(118.62,32.18) 119,32.57 119.11,32.57 119.55,33.01
  TOP w0.254: C135.2 119.55,32.62 R88.1
  BOTTOM w0.178: v3(75.18,7.87) 88.44,7.87 89.66,6.65 91.5,6.65 92.91,8.06 92.91,8.26 94.92,10.26 94.92,11.02 95.75,11.85 v3(96.3,11.85) ; v3(96.43,31.72) 118.15,31.72 v3(118.62,32.18)
DA_SIN_8: length 69.1
  TOP w0.178: v3(120.98,34.09) 121.13,34.09 121.13,34.09 121.13,34.14 121.13,34.14 121.56,34.14 ; U38.5 v3(80.57,6.78) ; v3(95.85,32.33) 95.85,31.52 95.96,31.41 95.96,12.29 95.75,12.08 95.75,11.63 95.76,11.62 v3(95.76,10.85)
  TOP w0.254: C136.2 121.6,33.26 121.56,33.3 121.56,34.14 121.58,34.16 R89.1
  BOTTOM w0.178: v3(80.57,6.78) 81.03,6.32 91.64,6.32 93.24,7.93 93.24,8.03 95.37,10.15 95.37,10.46 v3(95.76,10.85) ; v3(120.98,34.09) 115.01,34.09 113.26,32.33 v3(95.85,32.33)
